# EAGLE board BT832A (EAGLE 9.6.2)
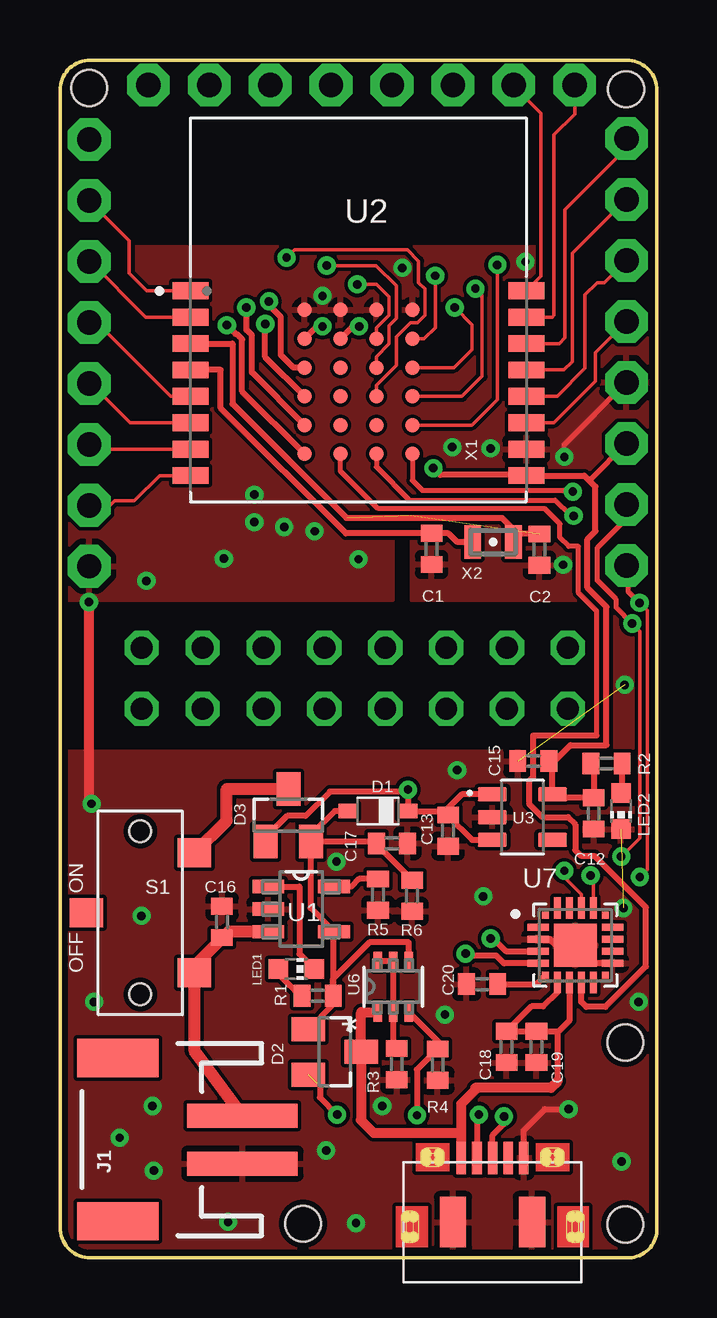
[diagram p0: board, top side]
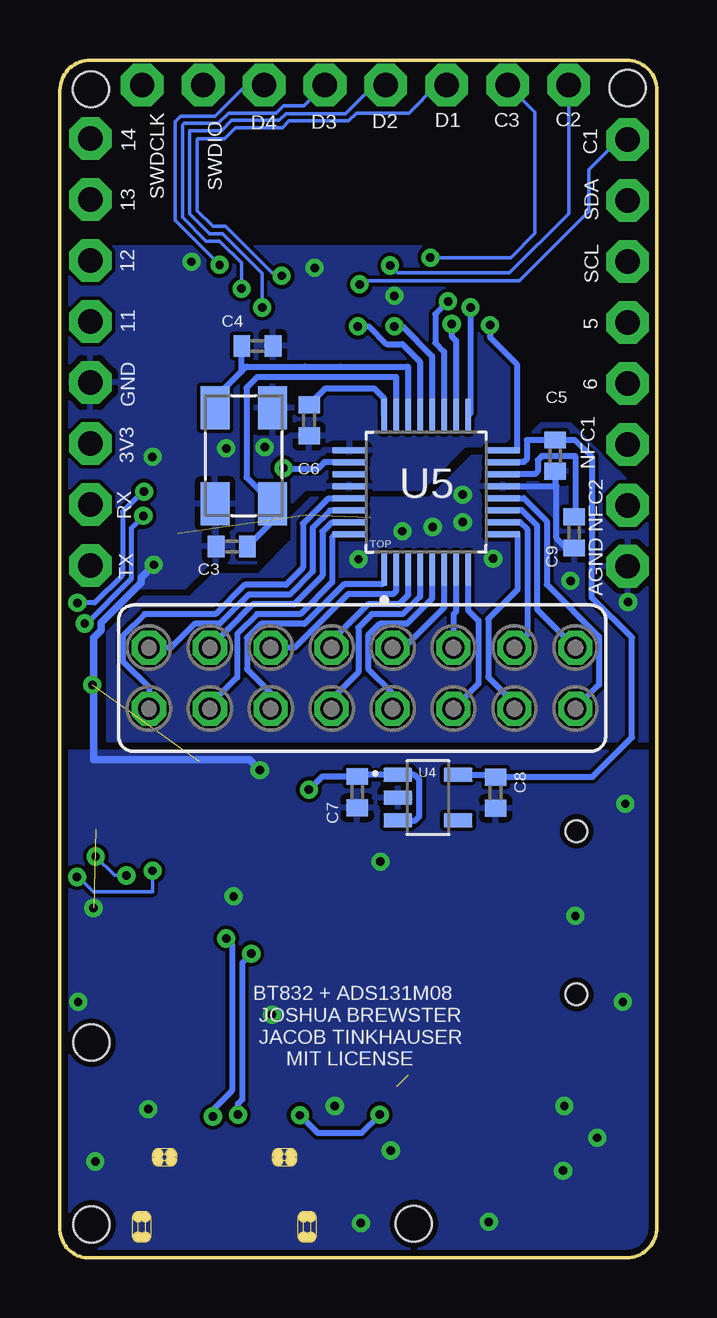
[diagram p1: board, bottom side, seen from below]

Size 24.89 x 49.91 mm. Coordinates in mm from the lower left corner, seen from the top.
Outline: 0,1.27 0,48.64 arc-90 1.27,49.91 23.62,49.91 arc-90 24.89,48.64 24.89,1.14 arc-90 23.62,0 1.27,0 arc-90 0,1.27
Copper layers (1*16): Top 0.035mm / dielectric 1.5mm / Bottom 0.035mm
Design rules "default *": minimum track width 6mil, minimum drill 0.35mm, track to track 6mil, track to pad 6mil, pad to pad 6mil, via to via 6mil, smd to smd 6mil, copper to edge 10mil, drill to drill 6mil, minimum pad ring 10mil, minimum via ring 8mil, stop-mask expansion 4mil, vias tented up to drill 0mil, thermal gap 10mil
Holes 1.5 mm at 23.6,48.69 1.22,48.74 23.57,1.4 10.13,1.42 23.57,8.97

## Footprints (pad centres in the part's own frame; a part is rotated, then mirrored left to right if it is on the bottom)
C0402 = smd 0.7 x 0.9: 1 -0.65,0; 2 0.65,0
SOD323_ST = smd 0.8 x 0.6: A 1.25,0; C -1.25,0
SOT23 = smd 1 x 1.4: 1 -0.95,-1.1; 2 0.95,-1.1; 3 0,1.1
JST-2-SMD = smd 1 x 4.6: 1 -1,-3.7; 2 1,-3.7 | smd 1.6 x 3.4: NC1 -3.4,1.5; NC2 3.4,1.5
1X08-CLEANBIG = drill 1.016 pad 1.778 octagon: 1 -8.89,0; 2 -6.35,0; 3 -3.81,0; 4 -1.27,0; 5 1.27,0; 6 3.81,0; 7 6.35,0; 8 8.89,0
CHIP-LED0603 = smd 0.8 x 0.8: A 0,-0.75; C 0,0.75
R0402 = smd 0.7 x 0.9: 1 -0.65,0; 2 0.65,0
CL-SB-12B = smd 1.2 x 1.4: 1 -2.5,-2.25; 2 0,2.25; 3 2.5,-2.25 | hole 0.9: 3.4,0; -3.4,0
FE08-2 = drill 0.914 octagon: 1 -8.89,1.27; 2 -8.89,-1.27; 3 -6.35,1.27; 4 -6.35,-1.27; 5 -3.81,1.27; 6 -3.81,-1.27; 7 -1.27,1.27; 8 -1.27,-1.27; 9 1.27,1.27; 10 1.27,-1.27; 11 3.81,1.27; 12 3.81,-1.27; 13 6.35,1.27; 14 6.35,-1.27; 15 8.89,1.27; 16 8.89,-1.27
SOT95P270X145-5N = smd 1.321 x 0.559: 1 -1.372,0.94; 2 -1.372,0; 3 -1.372,-0.94; 4 1.372,-0.94; 5 1.372,0.94
BLEMODULE_BT832 = smd 1.5 x 0.7: 1 -7,0.8; 2 -7,-0.3; 3 -7,-1.4; 4 -7,-2.5; 5 -7,-3.6; 6 -7,-4.7; 7 -7,-5.8; 8 -7,-6.9; 9 7,-6.9; 10 7,-5.8; 11 7,-4.7; 12 7,-3.6; 13 7,-2.5; 14 7,-1.4; 15 7,-0.3; 16 7,0.8 | smd 0.6 x 0.6: A0 -2.25,0; A1 -2.25,-1.2; A2 -2.25,-2.4; A3 -2.25,-3.6; A4 -2.25,-4.8; A5 -2.25,-6; B0 -0.75,0; B1 -0.75,-1.2; B2 -0.75,-2.4; B3 -0.75,-3.6; B4 -0.75,-4.8; B5 -0.75,-6; C0 0.75,0; C1 0.75,-1.2; C2 0.75,-2.4; C3 0.75,-3.6; C4 0.75,-4.8; C5 0.75,-6; D0 2.25,0; D1 2.25,-1.2; D2 2.25,-2.4; D3 2.25,-3.6; D4 2.25,-4.8; D5 2.25,-6
SOT95P280X145-5N = smd 1.21 x 0.59: 1 -1.255,0.95; 2 -1.255,0; 3 -1.255,-0.95; 4 1.255,-0.95; 5 1.255,0.95
QFP50P700X700X120-32N = smd 1.44 x 0.26: 1 -3.195,1.75; 2 -3.195,1.25; 3 -3.195,0.75; 4 -3.195,0.25; 5 -3.195,-0.25; 6 -3.195,-0.75; 7 -3.195,-1.25; 8 -3.195,-1.75; 17 3.195,-1.75; 18 3.195,-1.25; 19 3.195,-0.75; 20 3.195,-0.25; 21 3.195,0.25; 22 3.195,0.75; 23 3.195,1.25; 24 3.195,1.75 | smd 0.26 x 1.44: 9 -1.75,-3.195; 10 -1.25,-3.195; 11 -0.75,-3.195; 12 -0.25,-3.195; 13 0.25,-3.195; 14 0.75,-3.195; 15 1.25,-3.195; 16 1.75,-3.195; 25 1.75,3.195; 26 1.25,3.195; 27 0.75,3.195; 28 0.25,3.195; 29 -0.25,3.195; 30 -0.75,3.195; 31 -1.25,3.195; 32 -1.75,3.195
SOT363_NEX = smd 0.787 x 0.356: 1 -1.067,0.65; 2 -1.067,0; 3 -1.067,-0.65; 4 1.067,-0.65; 5 1.067,0; 6 1.067,0.65
SILABS_CP2102N-A02-GQFN20R = smd 0.3 x 0.3: 1 -1.25,1.25; 6 -1.25,-1.25; 11 1.25,-1.25; 16 1.25,1.25 | smd 0.9 x 0.3: 2 -1.55,0.75; 3 -1.55,0.25; 4 -1.55,-0.25; 5 -1.55,-0.75; 12 1.55,-0.75; 13 1.55,-0.25; 14 1.55,0.25; 15 1.55,0.75 | smd 0.3 x 0.9: 7 -0.75,-1.55; 8 -0.25,-1.55; 9 0.25,-1.55; 10 0.75,-1.55; 17 0.75,1.55; 18 0.25,1.55; 19 -0.25,1.55; 20 -0.75,1.55 | smd 1.8 x 1.8: 21 0,0
DX4R005JJ2R1800 = smd 1.35 x 0.4: 1 1.525,1.3; 2 1.525,0.65; 3 1.525,0; 4 1.525,-0.65; 5 1.525,-1.3 | smd 2.1 x 1.1: MP1 -1.15,1.65; MP2 -1.15,-1.65
ABM3B-8.000MHZ-B2-T = smd 1.8 x 1.2: 1 -2,-1.2; 2 2,-1.2; 3 2,1.2; 4 -2,1.2
FC-12M = smd 0.7 x 1.4: 1 -0.85,0; 2 0.85,0

## Placement (x,y rotation side)
C1  12.5pF  [C0402]  15.49,29.54 90 top
C2  12.5pF  [C0402]  19.99,29.52 90 top
C3  10pF  [C0402]  17.73,29.64 180 bottom
C4  10pF  [C0402]  16.66,38 0 bottom
C5  1uF  [C0402]  4.24,33.43 90 bottom
C6  220uF  [C0402]  14.5,34.9 270 bottom
C7  1uF  [C0402]  12.5,19.41 270 bottom
C8  1uF  [C0402]  6.73,19.38 270 bottom
C9  100uF  [C0402]  3.45,30.23 90 bottom
C12  1uF  [C0402]  22.25,18.52 90 top
C13  1uF  [C0402]  16.18,17.81 90 top
C15  10uF  [C0402]  19.74,20.7 0 top
C16  4.7uF  [C0402]  6.76,14 270 top
C17  4.7uF  [C0402]  13.84,17.27 180 top
C18  1.0uF  [C0402]  18.62,8.79 90 top
C19  0.1uF  [C0402]  19.86,8.79 90 top
C20  0.1uF  [C0402]  17.6,11.41 0 top
D1  BAT60J  [SOD323_ST]  13.26,18.62 180 top
D2  BAS40-06  [SOT23]  11.46,8.59 270 top
D3  BAS40-06  [SOT23]  9.53,18.44 0 top
J1  [JST-2-SMD]  3.91,4.93 90 top
JP1  [1X08-CLEANBIG]  23.62,37.75 270 top
JP2  [1X08-CLEANBIG]  1.22,37.71 270 top
JP3  [1X08-CLEANBIG]  12.57,48.87 0 top
LED1  [CHIP-LED0603]  9.86,12.04 270 top
LED2  [CHIP-LED0603]  23.39,18.62 180 top
R1  3.3kΩ  [R0402]  10.74,10.92 180 top
R2  3.3kΩ  [R0402]  22.78,20.6 180 top
R3  10kΩ  [R0402]  14.05,8.08 90 top
R4  47kΩ  [R0402]  15.75,8.05 270 top
R5  2kΩ  [R0402]  13.26,15.14 270 top
R6  10kΩ  [R0402]  14.68,15.09 90 top
S1  CL-SB-12B-01T  [CL-SB-12B]  3.35,14.38 90 top
SV1  [FE08-2]  12.29,24.16 0 bottom
U1  MCP73831T-3ACI/OT  [SOT95P270X145-5N]  10.06,14.53 0 top
U2  BT832  [BLEMODULE_BT832]  12.45,39.5 0 top
U3  LP5907MFX-3.3/NOPB  [SOT95P280X145-5N]  19.28,18.36 0 top
U4  LP5907MFX-3.3/NOPB  [SOT95P280X145-5N]  9.55,19.18 0 bottom
U5  ADS131M08IPBS  [QFP50P700X700X120-32N]  9.63,31.9 90 bottom
U6  BCM857BS  [SOT363_NEX]  13.89,11.3 90 top
U7  CP2102N-A02-GQFN20R  [SILABS_CP2102N-A02-GQFN20R]  21.49,13.03 0 top
U$1  DX4R005JJ2R1800  [DX4R005JJ2R1800]  18.03,2.64 90 top
X1  ABM3B-8.000MHZ-B2-T  [ABM3B-8.000MHZ-B2-T]  17.22,33.43 90 bottom
X2  FC-12M  [FC-12M]  18.06,29.82 0 top

## Library data of the parts
C1-C9 C12 C13 C15-C20 JP1-JP3 LED1 LED2 R1-R6 = adafruit
D1-D3 = diode
J1 = SparkFun-Connectors; PROD_ID: CONN-11443; SF_ID: PRT-08612
S1 = CL-SB-12B-01T; AVAILABILITY: In Stock; DESCRIPTION: Slide Switch SPDT Surface Mount; MF: Nidec Copal; MP: CL-SB-12B-01T; PACKAGE: None; PRICE: None
SV1 = con-lsta; OC_FARNELL: unknown; OC_NEWARK: unknown
U1 = MCP73831T-3ACI_OT; AVAILABILITY: In Stock; DESCRIPTION: Charger IC Lithium Ion/Polymer SOT-23-5; MF: Microchip; MP: MCP73831T-3ACI/OT; PACKAGE: SOT-23-5 Microchip; PRICE: None
U2 = BT832; AVAILABILITY: Not in stock; DESCRIPTION: Bluetooth Bluetooth v5.0 Transceiver Module 2.4GHz Integrated, Trace Surface Mount; MF: Fanstel Corp.; MP: BT832; PACKAGE: Module Fanstel Corp.; PRICE: None
U3 U4 = LP5907MFX-3.3_NOPB; AVAILABILITY: Unavailable; DESCRIPTION: Linear Voltage Regulator IC 1 Output 250mA SOT-23-5; MF: Texas Instruments; MP: LP5907MFX-3.3/NOPB; PACKAGE: SOT-23 Texas Instruments; PRICE: None
U5 = ADS131M08IPBS; AVAILABILITY: Warning; DESCRIPTION: 24-bit 32-kSPS 8-channelsimultaneous-sampling delta-sigma ADC 32-TQFP -40 to 125; MF: Texas Instruments; MP: ADS131M08IPBS; PACKAGE: TQFP-32 Texas Instruments; PRICE: None; PURCHASE-URL: https://pricing.snapeda.com/search/part/ADS131M08IPBS/?ref=eda
U6 = BCM857BS; COPYRIGHT: Copyright (C) 2016 Accelerated Designs. All rights reserved; MANUFACTURER_PART_NUMBER: BCM857BS; SOURCELIBRARY: Nexperia_2018-05-2018; VENDOR: Nexperia
U7 = CP2102N-A02-GQFN20R; AVAILABILITY: In Stock; DESCRIPTION: USB Bridge, USB to UART USB 2.0 UART Interface 20-QFN (3x3); MF: Silicon Labs; MP: CP2102N-A02-GQFN20R; PACKAGE: QFN-20 Silicon Labs; PRICE: None
U$1 = DX4R005JJ2R1800; AVAILABILITY: In Stock; DESCRIPTION: USB - micro B USB 2.0 Receptacle Connector 5 Position Surface Mount, Right Angle; Through Hole; MF: JAE Electronics; MP: DX4R005JJ2R1800; PACKAGE: None; PRICE: None
X1 = Crystals_Oscillators; CREATED_BY: PCBLayout.com; DIGIKEY_PART_NUMBER: 535-9720-2-ND; MANUFACTURER: Abracon LLC; MPN: ABM3B-8.000MHZ-B2-T; PACKAGE: SMD 4
X2 = crystal

## Nets
0N: SV1.1 U5.30
0P: SV1.2 U5.29
1N: SV1.3 U5.31
1P: SV1.4 U5.32
2N: SV1.5 U5.2
2P: SV1.6 U5.1
3N: SV1.7 U5.3
3P: SV1.8 U5.4
4N: SV1.9 U5.6
4P: SV1.10 U5.5
5: JP2.4 U2.5
5N: SV1.11 U5.7
5P: SV1.12 U5.8
6: JP2.5 U2.6
6N: SV1.13 U5.10
6P: SV1.14 U5.9
7N: SV1.15 U5.11
7P: SV1.16 U5.12
10K: R3.2 U6.2 U6.5 U6.6
11: JP1.4 U2.11
12: JP1.3 U2.12
13: JP1.2 U2.13
14: JP1.1 U2.14
+5V: C18.2 C19.2 D2.3 U6.1 U7.7 U7.8 U$1.1
AVDD: C5.2 C8.1 U4.5 U5.15
B+: C16.2 J1.2 S1.1 U1.3
BAT_D3: D3.3 S1.3
C1: JP2.1 U2.C1
C2: JP3.1 U2.C2
C3: JP3.2 U2.C3
CAP: C6.1 U5.24
CPRST: U2.B5 U7.9
CPVDD: C20.2 U7.6
CS: U2.A4 U5.17
D1: JP3.3 U2.D1
D2: JP3.4 U2.D2
D3: JP3.5 U2.D3
D4: JP3.6 U2.D4
D+: U7.4 U$1.3
D-: U7.5 U$1.2
DIN: U2.B1 U5.21
DOUT: U2.A1 U5.20
DRDY: U2.A3 U5.18
GND: C1.1 C2.1 C3.2 C4.2 C5.1 C6.2 C7.2 C8.2 C9.1 C12.1 C13.1 C15.1 C16.1 C17.1 C18.1 C19.1 C20.1 J1.1 JP1.5 JP2.8 LED2.C R3.1 R4.2 R5.2 R6.1 U1.2 U2.10 U2.A0 U2.B0 U2.C0 U2.D0 U3.2 U4.2 U5.13 U5.25 U5.28 U7.3 U7.12 U7.21 U$1.5 U$1.MP1 U$1.MP2 X1.2 X1.4
ID: U$1.4
N$1: LED2.A R2.1
N$9: R5.1 U1.5
N$11: LED1.A R1.2
N$14: D2.2 R4.1 U6.3
N$18: LED1.C U1.1
NFC1: JP2.6 U2.7
NFC2: JP2.7 U2.8
NVD: C17.2 D1.A D2.1 D3.2 R1.1 R6.2 U1.4 U6.4
REFIN: C9.2 U5.14
RXD: JP1.7 U2.C5 U7.17
SCL: JP2.3 U2.2
SCLK: U2.A2 U5.19
SDA: JP2.2 U2.1
SWDCLK: JP3.8 U2.15
SWDIO: JP3.7 U2.16
SYNC/RESET: U2.A5 U5.16
TXD: JP1.8 U2.D5 U7.18
VDD: C12.2 C15.2 JP1.6 R2.2 U2.9 U3.5 U5.26
VIN: C7.1 C13.2 D1.C D3.1 U3.1 U3.3 U4.1 U4.3
XTAL1_1: C2.2 U2.3 X2.2
XTAL1_2: C3.1 U5.23 X1.1
XTAL2_1: C1.2 U2.4 X2.1
XTAL2_2: C4.1 U5.22 X1.3

## Tracks (layer width: path | path; a pad name or v marks a point on that pad's centre or on a via)
0N
  Bottom 0.254: U5.30 12.84,31.14 13.64,31.14 14.35,30.42 14.35,28.59 15.31,27.64 17.02,27.64 18.24,26.42 19.28,26.42 20.27,25.43 SV1.1
0P
  Bottom 0.254: U5.29 12.84,31.64 13.71,31.64 14.76,30.59 14.76,28.76 15.48,28.04 17.19,28.04 18.41,26.82 21.37,26.82 22.28,25.91 22.28,24.86 21.18,23.77 SV1.2
1N
  Bottom 0.254: U5.31 12.84,30.64 13.56,30.64 13.95,30.26 13.95,28.42 15.14,27.23 16.85,27.23 17.91,26.17 17.91,26.16 SV1.3
1P
  Bottom 0.254: U5.32 13.41,30.15 13.54,30.02 13.54,28.15 14.87,26.82 16.68,26.82 17.5,26 17.5,24.19 18.64,23.04 SV1.4
2N
  Bottom 0.254: U5.2 10.88,27.78 11,27.66 12.88,27.66 15.11,25.43 SV1.5
2P
  Bottom 0.254: SV1.6 16.1,23.54 17.09,24.53 17.09,25.84 16.51,26.42 14.7,26.42 13.05,28.06 11.48,28.06 11.38,28.17 U5.1
3N
  Bottom 0.254: U5.3 10.38,27.62 10.77,27.23 12.05,27.23 13.56,25.72 SV1.7
3P
  Bottom 0.254: U5.4 9.88,27.54 10.6,26.82 11.88,26.82 12.45,26.26 12.45,24.39 13.56,23.27 SV1.8
4N
  Bottom 0.254: SV1.9 10.54,25.43 8.88,27.09 U5.6
4P
  Bottom 0.254: U5.5 9.38,27.47 10.43,26.42 11.56,26.42 12.04,25.94 12.04,24.53 11.02,23.52 SV1.10
5
  Top 0.152: U2.5 4.62,35.9 1.54,38.98 JP2.4
5N
  Bottom 0.254: U5.7 8.38,26.93 8.48,26.82 SV1.11
5P
  Bottom 0.254: U5.8 7.88,26.98 7.44,26.55 7.44,23.93 SV1.12
6
  Top 0.152: U2.6 2.92,34.8 1.28,36.44 JP2.5
6N
  Bottom 0.254: U5.10 5.71,30.65 5.41,30.36 5.41,25.96 SV1.13
6P
  Bottom 0.254: U5.9 5.82,30.15 5.82,27.84 7.04,26.62 7.04,24.2 5.94,23.11 SV1.14
7N
  Bottom 0.254: U5.11 6.42,31.16 5.64,31.16 5,30.52 5,27.03 SV1.15
7P
  Bottom 0.254: U5.12 5.56,31.65 4.6,30.69 4.6,28.07 2.41,25.88 2.41,23.88 SV1.16
10K
  Top 0.254: U6.6 U6.5 U6.2 13.89,8.88 R3.2
11
  Top 0.152: U2.11 20.6,34.8 22.33,36.53 22.33,37.72 JP1.4
12
  Top 0.152: U2.12 20.73,35.9 21.89,37.06 21.89,40.13 22.4,40.64 22.71,40.64 JP1.3
13
  Top 0.152: U2.13 21.02,37 21.36,37.34 21.36,41.86 23.6,44.09 JP1.2
14
  Top 0.152: U2.14 20.82,38.1 21.06,38.33 21.06,43.66 23.62,46.23 JP1.1
+5V
  Top 0.254: 20.75,7.37 20.75,9.4 | 20.75,9.4 20.75,9.42 20.74,9.44 C19.2 C18.2 19.66,10.48 20.14,10.48 20.74,11.08 U7.7 | 20.75,9.4 21.26,9.91 21.26,11.46 U7.8
  Top 0.406: U6.1 12.55,10.24 D2.3 12.55,5.74 13.08,5.21 16.73,5.21 | U$1.1 16.73,5.21 | 16.73,5.21 16.73,6.41 17.41,7.09 | 20.75,7.37 20.47,7.09 17.41,7.09 | 17.41,7.09 17.31,7.09
AVDD
  Bottom 0.254: U4.5 6.83,20.13 C8.1 6.72,20.04 2.69,20.04 1.04,21.69 1.04,25.86 2.72,27.52 2.72,28.7 | 2.72,28.7 2.73,33.37 3.43,34.08 C5.2 5.43,34.08 5.43,33.27 5.54,33.17 6.42,33.17 U5.15 | 2.72,28.7
B+
  Top 0.152: C16.2 6.76,13.31
  Top 0.508: J1.2 5.6,8.65 S1.1 5.6,12.16 6.76,13.31 7.04,13.59 U1.3
BAT_D3
  Top 0.508: S1.3 6.95,18.22 6.95,19.54 D3.3
C1  (via drill 0.35)
  Top 0.152: U2.C1 13.2,38.75 13.73,39.28 13.73,40.05 13.21,40.56 v12.39,40.56
  Bottom 0.152: v12.39,40.56 12.24,40.72 5.74,40.72 2.84,43.61 2.84,45.34 1.59,46.6 JP2.1
C2  (via drill 0.35)
  Top 0.152: U2.C2 13.2,37.55 13.73,38.08 13.73,38.85 14.03,39.15 14.03,40.5 13.18,41.35 v11.12,41.35
  Bottom 0.152: v11.12,41.35 10.82,41.04 6.15,41.04 3.68,43.51 JP3.1
C3  (via drill 0.35)
  Top 0.152: U2.C3 13.2,36.35 14.03,37.18 14.03,38.38 14.62,38.97 14.91,38.97 15.23,39.28 15.23,40.37 14.96,40.64 14.96,41.53 14.48,42.01 9.78,42.01 v9.45,41.68
  Bottom 0.152: v9.45,41.68 6.1,41.68 5.08,42.69 5.08,47.73 JP3.2
CAP
  Bottom 0.254: U5.24 11.38,35.81 11.79,36.22 13.83,36.22 C6.1
CPRST
  Top 0.203: 22.38,21.77 22.38,26.95 21.62,27.71 21.62,29.64 21.21,29.64 20.85,30 20.85,30.58 20.21,31.22 13.26,31.22 11.7,32.79 11.7,33.38
  Top 0.254: 11.8,33.5 U2.B5 11.7,33.38 | 22.38,21.77 19.74,21.77 19.74,20.04 19.56,19.86 19.56,18.92 20.12,18.36 21.18,18.36 21.49,18.06 21.49,16.99 21.74,16.74 22.3,16.74 24.44,14.61 24.44,12.14 22.75,10.46 21.95,10.46 21.74,10.66 U7.9
CPVDD
  Top 0.254: C20.2 19.86,11.41 U7.6
CS  (via drill 0.35)
  Top 0.254: U2.A4 8,36.89 8,38.43 7.77,38.66 v7.77,39.6
  Bottom 0.254: v7.77,39.6 7.77,35.2 U5.17
D1  (via drill 0.35)
  Top 0.152: U2.D1 15.18,38.3 15.65,38.77 v15.65,40.92
  Bottom 0.152: v15.65,40.92 15.93,40.92 17.98,42.98 18.52,42.98 19.18,43.64 19.18,46.61 19.15,46.63 18.03,46.63 17.58,47.09 15.62,47.09 15.34,47.37 12.85,47.37 12.52,47.7 10.34,47.7 9.17,48.87 JP3.3
D2  (via drill 0.35)
  Top 0.152: U2.D2 16.42,37.1 17.17,37.85 17.17,38.89 v16.46,39.6
  Bottom 0.152: v16.46,39.6 16.46,41.02 18.11,42.67 18.64,42.67 19.48,43.51 19.48,46.97 18.16,46.97 17.73,47.4 15.75,47.4 15.47,47.68 12.98,47.68 11.79,48.87 JP3.4
D3  (via drill 0.35)
  Top 0.152: U2.D3 16.77,35.9 17.6,36.73 17.6,40.11 v17.32,40.39
  Bottom 0.152: JP3.5 14.71,48.01 15.57,48.01 15.88,47.7 17.86,47.7 18.29,47.27 19.71,47.27 19.79,47.19 19.79,43.36 18.8,42.37 18.24,42.37 17.32,41.45 v17.32,40.39
D4  (via drill 0.35)
  Top 0.152: U2.D4 17.17,34.7 18.24,35.76 v18.24,41.38
  Bottom 0.152: v18.24,41.38 20.09,43.23 20.09,47.35 19.86,47.57 18.41,47.57 17.12,48.87 JP3.6
D+  (via drill 0.35)
  Top 0.254: U$1.3 18.03,5.11 18.49,5.56 18.49,5.87 v18.52,5.89 | v17.96,13.31 18.06,13.31 18.59,12.78 U7.4
  Bottom 0.254: v17.96,13.31 17.72,13.07 17.72,6.97 18.52,6.17 v18.52,5.89
D-  (via drill 0.35)
  Top 0.254: U$1.2 17.39,4.17 17.39,5.89 v17.47,5.97 | v16.91,12.68 16.99,12.6 18.2,12.6 18.52,12.28 U7.5
  Bottom 0.254: v16.91,12.68 17.29,12.3 17.29,6.6 17.47,6.43 v17.47,5.97
DIN  (via drill 0.35)
  Top 0.254: v12.47,38.81 12.21,38.81 U2.B1
  Bottom 0.254: v12.47,38.81 12.01,38.81 11.28,38.08 10.62,38.08 9.88,37.33 U5.21
DOUT  (via drill 0.35)
  Top 0.254: U2.A1 10.71,38.81 v10.95,38.81
  Bottom 0.254: v10.95,38.81 10.62,38.81 9.38,37.57 U5.20
DRDY  (via drill 0.35)
  Top 0.254: U2.A3 8.56,37.53 v8.56,38.91
  Bottom 0.254: v8.56,38.91 8.56,38.41 8.38,38.22 U5.18
GND  (via drill 0.35)  (2 unrouted)
  Top 0.203: v21.03,33.38 21.03,33.88 JP1.5
  Top 0.254: R5.2 13.31,14.54 | U$1.5 19.33,5.31 20.22,6.2 v21.21,6.2 | U7.12 22.24,12.28 U7.21 20.68,13.03 20.43,13.29 U7.3
  Top 0.406: v1.21,27.33 1.19,27.32 1.19,19.05 v1.32,18.92
  Bottom 0.254: U5.13 4.24,32.15 | 4.24,32.15 4.19,32.15 4.19,29.99 3.77,29.58 C9.1 | C5.1 4.24,32.15
  Bottom 0.305: v20.98,28.88 21.52,28.34 21.52,28.12 23.18,26.46 23.18,26.15 23.5,25.83 23.5,20.75 16.99,20.75 v16.56,20.32
  other vias: 1.42,10.67 2.49,5 7.01,1.5 11.1,4.47 10.62,30.28 9.35,30.46 8.1,30.66 8.1,31.8 6.83,29.13 12.45,29.11 3.61,28.21 16.05,10.14 13.44,6.33 16.36,33.78 14.27,41.25 10.95,40.08 19.41,41.5 12.34,1.45 3.4,14.25 24.13,10.67 23.42,4.01 11.53,16.51 3.91,3.63 17.96,33.73 23.55,23.88 3.86,6.33 17.65,15.06 23.5,14.58
  pour Bottom: 0,21.11 24.89,21.11 24.89,0 0,0
  pour Bottom: 0,21.54 22.91,21.54 22.91,26.06 21.44,27.53 19.46,27.53 18.52,28.47 16.64,28.47 15.19,29.92 15.19,30.89 14.43,31.65 9.47,31.65 7.72,33.4 6.17,33.4 4.83,34.75 3.61,34.75 0,31.14
  pour Bottom: 0,31.98 3.3,35.28 5.03,35.28 6.48,33.83 6.86,33.83 8,33.83 9.47,32.36 9.8,32.03 13.79,32.03 14.68,32.03 15.49,31.22 15.6,31.12 15.6,30.1 16.74,28.96 17.27,28.96 18.64,28.96 19.69,27.92 24.89,27.92 24.89,42.14 0,42.14
  pour Top: 0,0 0,21.11 22.05,21.11 22.56,21.62 22.56,27.41 14.66,27.41 14.66,30.02 13.89,30.02 13.89,27.41 0,27.41 0,42.14 24.89,42.14 24.89,0
N$1
  Top 0.254: LED2.A 23.39,19.49 23.43,19.53 R2.1
N$9
  Top 0.254: R5.1 12.47,15.79 12.15,15.47 U1.5
N$11
  Top 0.254: LED1.A 9.11,11.81 9.54,11.37 9.99,10.92 R1.2
N$14  (via drill 0.35)  (1 unrouted)
  Top 0.254: U6.3 15.8,8.98 15.8,8.75 R4.1 14.88,7.84 v14.88,5.94 | 10.84,7.15 10.84,6.69 v11.56,5.97
  Bottom 0.254: v11.56,5.97 12.32,5.21 14.15,5.21 v14.88,5.94
N$18
  Top 0.254: U1.1 9.98,15.47 9.98,12.66 LED1.C
NFC1
  Top 0.152: U2.7 2.09,33.7 1.89,33.9 JP2.6
NFC2
  Top 0.152: U2.8 4.15,32.6 3.1,31.55 2.29,31.55 2.1,31.36 JP2.7
NVD
  Top 0.254: D1.A 11.45,18.62 10.48,17.65 D3.2 | R6.2 14.68,15.75 13.16,17.27 | D3.2 13.09,17.34 13.16,17.27 | R1.1 11.39,13.55 U1.4 10.44,14.58 10.44,17.31 D3.2 | D2.1 11.39,10.57 R1.1 | U6.4 14.54,13.15 12.91,13.15 11.39,11.63 R1.1 | C17.2 13.16,17.27
REFIN
  Bottom 0.254: 3.55,30.98 C9.2 3.4,30.93 3.4,33.41 4.81,33.41 4.97,33.24 4.97,32.78 5.1,32.65 5.23,32.65 5.56,32.65 U5.14
RXD  (via drill 0.35)
  Top 0.152: v23.86,26.43 24.17,26.12 24.17,17.49 v23.4,16.72 | U7.17 22.24,15.93 v22.12,15.93
  Top 0.203: U2.C5 13.2,32.96 14.57,31.58 20.64,31.58 21.3,30.91 v21.41,30.91 | v23.86,26.43 23.19,27.1 23.19,27.44 22.4,28.23 22.4,29.58 23.62,30.8 JP1.7
  Bottom 0.152: v23.4,16.72 22.61,15.93 v22.12,15.93
  Bottom 0.203: v23.86,26.43 23.78,26.43 21.92,28.29 21.92,30.41 v21.41,30.91
SCL
  Top 0.152: U2.2 3.58,39.2 1.26,41.52 JP2.3
SCLK  (via drill 0.35)
  Top 0.254: v8.71,39.85 8.71,39.69 9.22,39.19 9.22,37.62 9.74,37.1 U2.A2
  Bottom 0.254: v8.71,39.85 9.25,39.32 9.25,38.13 8.88,37.76 U5.19
SDA
  Top 0.152: U2.1 3.62,40.3 2.9,41.02 2.9,42.38 JP2.2
SWDCLK
  Top 0.152: U2.15 20.53,39.2 20.6,39.27 20.6,46.79 21.46,47.65 JP3.8
SWDIO
  Top 0.152: U2.16 20.06,40.91 20.06,47.69 18.92,48.82 JP3.7
SYNC/RESET  (via drill 0.35)
  Top 0.254: U2.A5 7.59,36.1 7.59,38.27 7.36,38.5 7.32,38.5 v6.96,38.86
  Bottom 0.254: v6.96,38.86 6.96,38.35 5.85,37.24 5.85,33.65 U5.16
TXD  (via drill 0.35)
  Top 0.152: v24.16,27.29 24.48,26.98 24.48,16.17 v24.18,15.87 | v21.03,16.13 21.03,15.86 21.74,15.16 U7.18
  Top 0.203: U2.D5 14.7,32.4 15.11,31.98 21.18,31.98 | 21.18,31.98 | 21.18,31.98 21.38,31.98 21.39,31.98 v21.39,31.93 | v24.16,27.29 23.69,27.77 23.69,28.79 JP1.8
  Bottom 0.152: v24.18,15.87 24.12,15.87 23.52,15.26 21.03,15.26 v21.03,16.13
  Bottom 0.203: v21.39,31.93 21.44,31.93 22.29,31.08 22.29,28.45 23.44,27.29 v24.16,27.29
VDD  (via drill 0.35)
  Top 0.152: 19.41,32.63 U2.9 | C15.2 20.48,20.61 20.53,20.61
  Top 0.203: JP1.6 22.09,32.4 22.06,32.4
  Top 0.254: R2.2 22.25,20.48 C12.2 20.68,19.17 U3.5 20.53,20.61 21.29,21.36 22.78,21.36 22.78,27.13 22,27.92 22,29.95 22.33,30.28 22.33,32.13 22.06,32.4 21.86,32.6 U2.9 | 19.41,32.63 15.85,32.63 v15.57,32.91
  Bottom 0.152: 15.55,32.88 v15.57,32.91
  Bottom 0.254: U5.26 13.86,33.15 14.13,32.88 15.55,32.88
VIN  (via drill 0.35)
  Top 0.254: C13.2 16.16,18.62 D1.C v14.51,19.51 14.43,19.43 11.25,19.43 10.24,18.42 9.47,18.42 8.57,17.53 D3.1 | U3.1 16.75,19.31 16.18,18.74 C13.2 | C13.2 16.18,18.43 17.2,17.41 U3.3
  Bottom 0.254: U4.3 10.09,18.22 9.91,18.4 9.91,19.91 10.12,20.13 U4.1 12.43,20.13 C7.1 13.96,20.06 v14.51,19.51
XTAL1_1  (2 unrouted)
  Top 0.254: U2.3 7.19,38.1 7.19,35.59 11.94,30.84 18.43,30.84 19.1,30.17 C2.2
XTAL1_2
  Bottom 0.254: U5.23 10.88,36.7 16.66,36.7 17.11,36.25 17.11,32.52 X1.1 15.95,31.35 15.95,30.78 C3.1
XTAL2_1
  Top 0.254: U2.4 6.71,37 6.71,35.41 11.92,30.19 C1.2 16.2,30.19 16.57,29.82 X2.1
XTAL2_2
  Bottom 0.254: U5.22 10.38,37.12 10.39,37.14 13.21,37.14 14.68,37.14 17.12,37.14 17.31,36.94 | X1.3 18.42,35.83 17.31,36.94 | 17.31,36.94 C4.1

## Text on the board
tPlace: OFF ON | S1
bPlace: C2 | C3 | D1 | D2 | D3 | D4 | C1 | 14 | SDA | SWDIO | SWDCLK | 13 | SCL | 12 | 5 | 11 | 6 | GND | NFC1 | 3V3 | NFC2 | RX | TOP | TX | AGND | BT832 + ADS131M08 / JOSHUA BREWSTER / JACOB TINKHAUSER / MIT LICENSE
Measures: Notes: / - Minimize space without jeopardizing grounding for the external ADC / i.e. be keen with ground plane traces and electron flow. / - Break out all unused programmable pins plus ADC inputs. / ADC inputs may have to be a (CHEAP) SMT connector backside to minimize possible interference from the radio, / but let's just break them out first and test. Let's still ID a 16-20 pin connector.